# Altium PCB GatewayV1.PcbDoc
Units mil, origin at the board's own origin, x right, y up, seen from the top; angles counter-clockwise.
Board outline 2060 x 2790 mil, 2 copper layers (Top Layer, Bottom Layer); 49 components, 35 nets, 208 pads, 4 vias.
Unrouted connection lines stored in the file: 75.
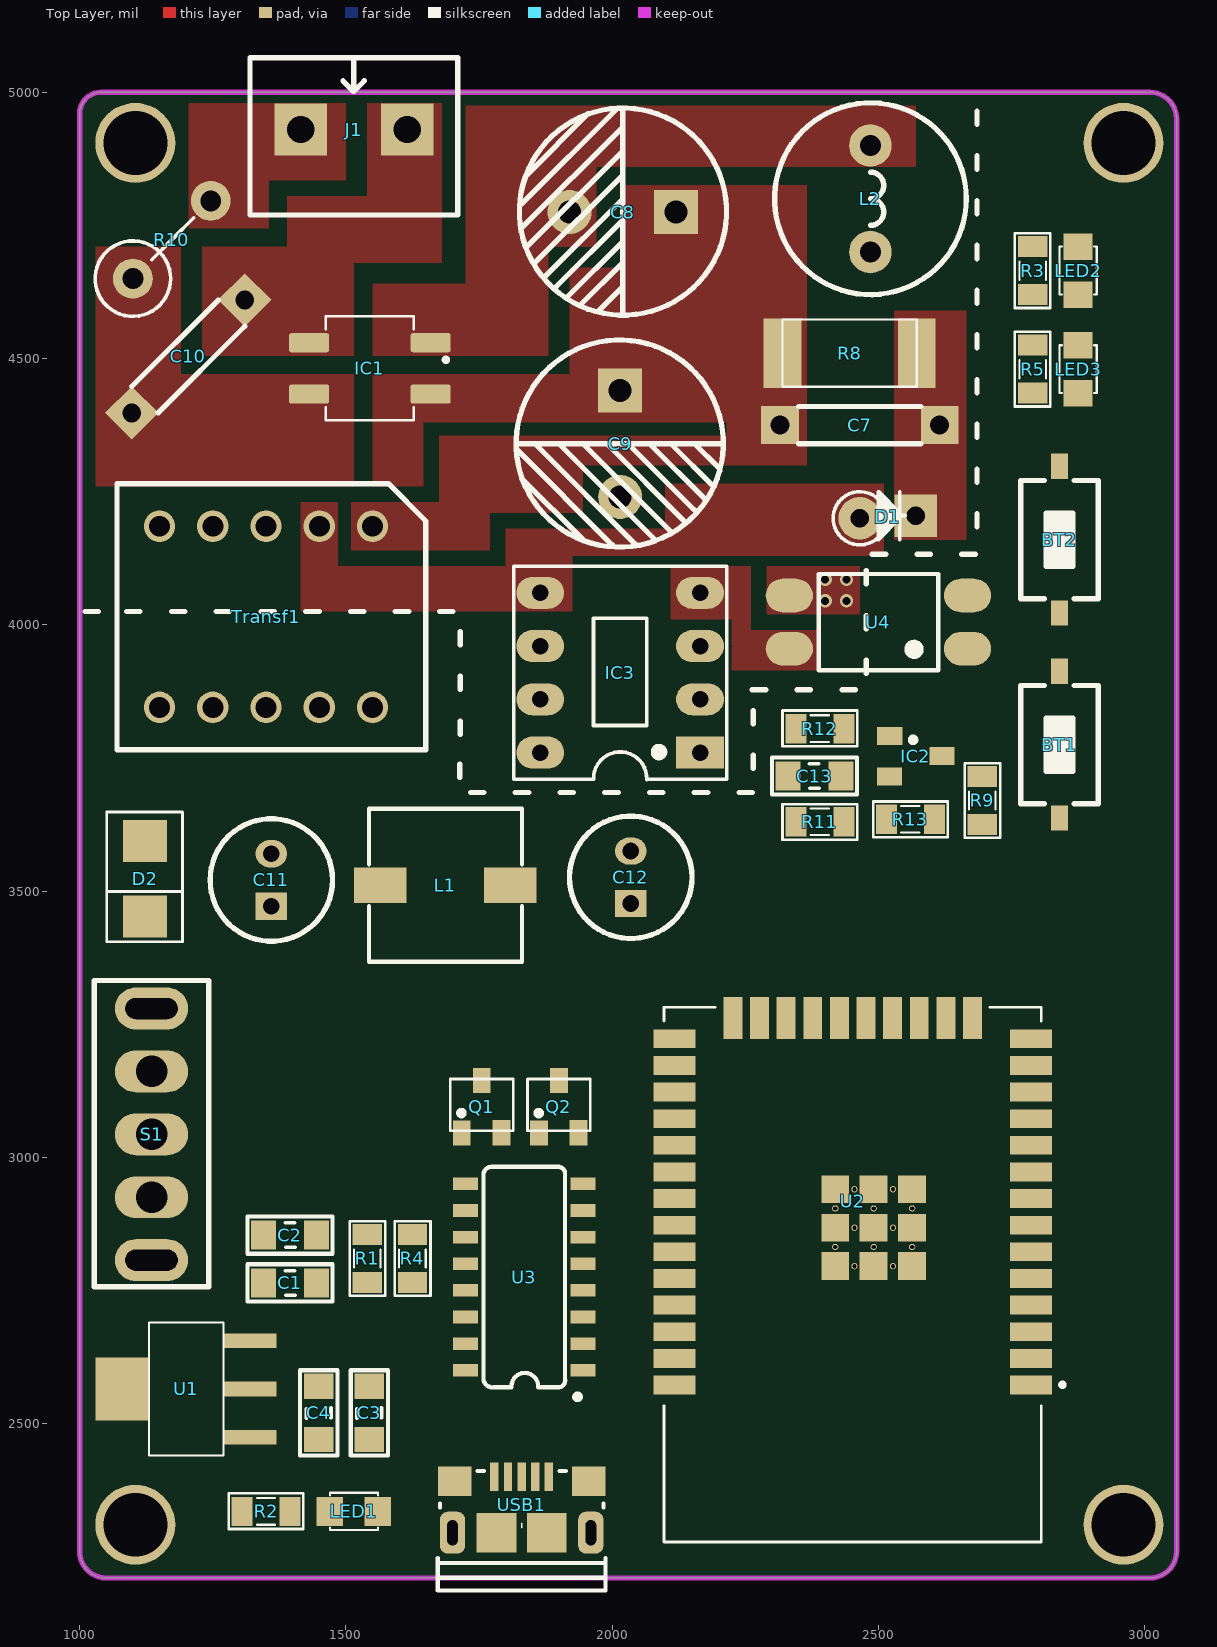
[diagram p0: Top Layer view]
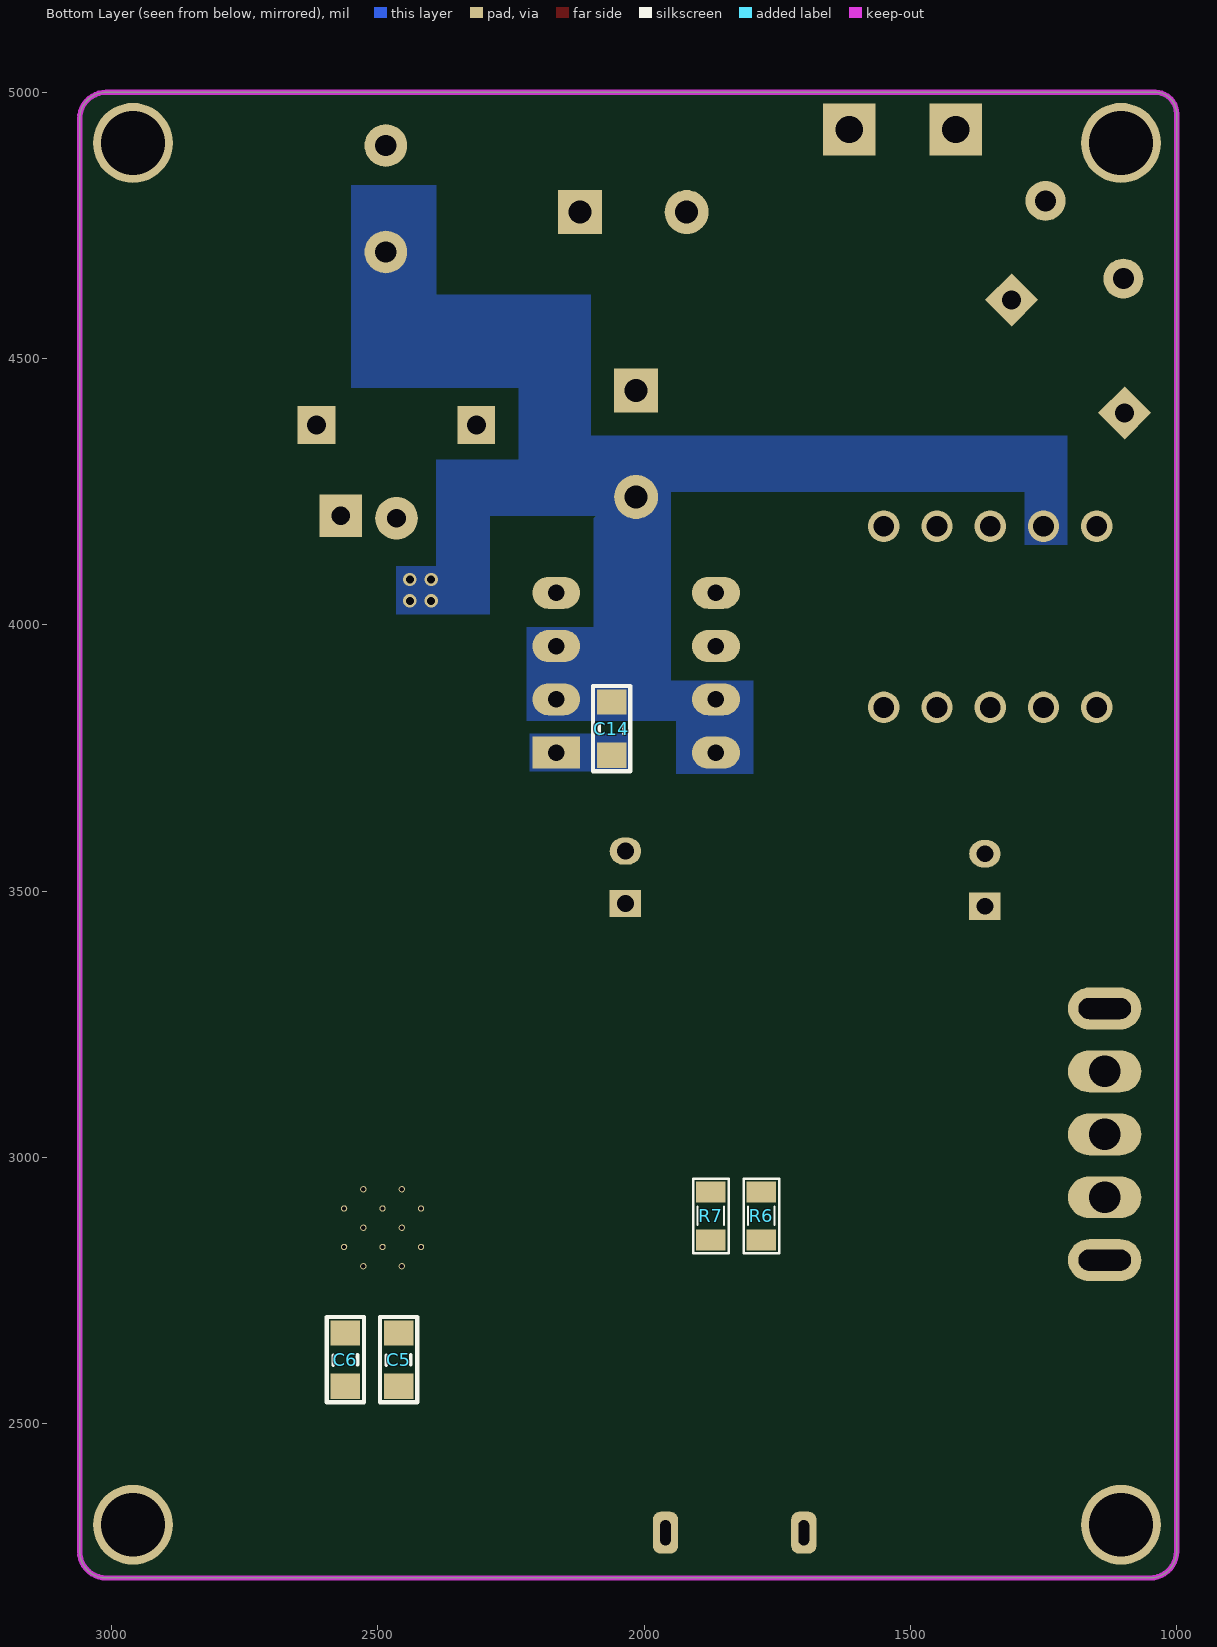
[diagram p1: Bottom Layer view, seen from below]

## Layer stack, top to bottom
Top Solder: solder mask 0.4, Solder Resist, Dk 3.5
Top Layer: signal copper 1.4
Dielectric 1: dielectric 12.6, FR-4, Dk 4.8
Bottom Layer: signal copper 1.4
Bottom Solder: solder mask 0.4, Solder Resist, Dk 3.5

## Board outline
1000,2260 1000,4960 cw(c1040,4960) 1040,5000 3010,5000 cw(c3010,4950) 3060,4950 3060,2260 cw(c3010,2260) 3010,2210 1050,2210 cw(c1050,2260)

## Design rules (kind name [scope] priority, off if disabled: settings)
Clearance [All] p1: gap=15 ignorepadtopadclearanceinfootprint=TRUE
PolygonConnect [All] p1: connectstyle=Direct reliefconductorwidth=10 reliefentries=4 polygonreliefangle="90 Angle" airgapwidth=10
RoutingVias [All] p1: holewidth=28 width=50 viastyle="Through Hole" minholewidth=15 minwidth=25 maxholewidth=90 maxwidth=100
SolderMaskExpansion [All] p1: expansion=4 istentingtop=FALSE
Width [All] p1: maxlimit=100 minlimit=10 preferedwidth=10
30 further rules are at their usual default settings.

## Classes and differential pairs
component class Power: C7 C8 C9 C10 C11 C12 C13 C14 D1 D2 IC1 IC2 IC3 J1 L1 L2 R8 R9 R10 R11 R12 R13 S1 Transf1 U4
component class ESP32: BT1 BT2 C1 C2 C3 C4 C5 C6 LED1 LED2 LED3 Q1 Q2 R1 R2 R3 R4 R5 R6 R7 U1 U2 U3 USB1

## Components (designator, comment, footprint, x,y, rotation, side; value= is the part's Value field where it differs from the comment)
BT1 "Nut Nhan 2 Chan SMD 3x6x2.5" "Nut Nhan 2 Chan SMD 3x6x2.5" 2840,3775 r270 top
BT2 "Nut Nhan 2 Chan SMD 3x6x2.5" "Nut Nhan 2 Chan SMD 3x6x2.5" 2840,4160 r270 top
C1 "10uF" CAP_0805 1395,2765 r0 top value=33p
C2 "100nF" CAP_0805 1395,2855 r0 top value=33p
C3 "10uF" CAP_0805 1545,2520 r270 top value=33p
C4 "100nF" CAP_0805 1450,2520 r270 top value=33p
C5 "100nF" CAP_0805 2460,2620 r270 bottom value=33p
C6 "10uF" CAP_0805 2560,2620 r270 bottom value=33p
C7 "1nF/400V" 103/2KV 2315,4375 r0 top
C8 "10uF/400V" C10mm 2019.65,4772.56 r180 top
C9 "10uF/400V" C10mm 2017.44,4339.65 r270 top
C10 "20D471K" 103/2KV 1310,4610 r225 top
C11 "680uF/16V" C8mm 1360,3520.79 r90 top
C12 "470uF/16V" C8mm 2035,3525.79 r90 top
C13 "100nF" CAP_0805 2380,3715 r180 top value=33p
C14 "100nF" CAP_0805 2060,3805 r270 bottom value=33p
D1 "1N4937" DIO-1AN 2520,4205 r180 top value=1N5007
D2 "SS14" DO-214AC(SMA) 1120,3545 r90 top value=1N5007
IC1 "MB6S" MB6S 1550,4470 r180 top
IC2 "TL431" TL431_SOT 2580,3750 r270 top
IC3 "TNY264" DIP8 2015,3905 r90 top
J1 "AC-IN" KF2-5.08 1515,4930 r0 top
L1 "22uH" L_SMD 1675,3505 r90 top value="150 mH"
L2 "L-DIP-1" Inductor 2485,4800 r270 top value="150 mH"
LED1 "LED" LED-0805-Red 1470,2335 r0 top value="LED 3 ly Single Colour"
LED2 "LED" LED-0805-Red 2875,4620 r90 top value="LED 3 ly Single Colour"
LED3 "LED" LED-0805-Red 2875,4435 r90 top value="LED 3 ly Single Colour"
Q1 "C1815" SOT23D 1755,3095 r0 top
Q2 "C1815" SOT23D 1900,3095 r0 top
R1 "10k" RES-SMD-0805 1540,2810 r90 top
R2 "1k" RES-SMD-0805 1350,2335 r180 top
R3 "1k" RES-SMD-0805 2790,4665 r270 top
R4 "10k" RES-SMD-0805 1625,2810 r90 top
R5 "1k" RES-SMD-0805 2790,4480 r270 top
R6 "10k" RES-SMD-0805 1780,2890 r90 bottom
R7 "10k" RES-SMD-0805 1875,2890 r90 bottom
R8 "82k" RES-SMD-2512 2445.98,4505 r0 top
R9 "200R" RES-SMD-0805 2695,3670 r90 top
R10 "2R/2W" RES-1WW 1145.96,4695.96 r45 top
R11 "10k" RES-SMD-0805 2390,3630 r0 top
R12 "3.3k" RES-SMD-0805 2390,3805 r180 top
R13 "10k" RES-SMD-0805 2560,3635 r0 top
S1 "Switch" Switch 1135,2806.89 r90 top
Transf1 "Transformer EE12.7" "Transformer EE12.7" 1350,4015 r180 top
U1 "LM1117-ADJ" LM1117-SOP 1270,2565 r90 top
U2 "ESP32-WROOM-32" MODULE_ESP32-WROOM-32 2451.75,2779.57 r180 top
U3 "CH340C" SO016 1835,2775 r90 top
U4 "OPTO PC817 SMD" SOP4 2500,4005 r180 top value=PC817
USB1 "USB Micro 5p DIP" "USB Micro 5p DIP" 1830,2295 r0 top

## Footprints (in the part's own frame and the unit in brackets; to place one, negate y for a bottom-side part, rotate by r counter-clockwise, add the part's x,y. Pads: shape width x height; smd on the part's side, far side on the other; paste and mask are expansions set on the pad)
103/2KV [mm]
  rect 1.8x1.8 hole 0.9: 1(0,0) 2(7.62,0)
  silkscreen extent 0.89,-0.89 6.73,0.89, body extent -0.19,-1.2 7.81,1.19, height 9.03
C8mm [mm]
  rect 1.3x1.5 hole 0.8: 1(-1.25,0)
  oval 1.3x1.5 hole 0.8: 2(1.25,0)
  silkscreen extent -2.92,-2.92 2.92,2.92, body extent -3.15,-3.15 3.16,3.15, height 11.51
C10mm [mm]
  rect 2.1x2.1 hole 1.1: 1(-2.549,-0.062)
  round 2.1 hole 1.1: 2(2.531,-0.062)
  silkscreen extent -4.96,-5.02 4.92,4.85, body extent -5.01,-5.06 4.96,4.94, height 20.01
CAP_0805 [mm]
  rect 1.2x1.4 smd: 1(-1.27,-0.025) 2(1.27,-0.025)
  silkscreen extent -2.03,-0.91 2.03,0.86, body extent -1.01,-0.66 1.01,0.61, height 0.61
DIO-1AN [mil] "Diode 1A, W 100mil, L 150mil"
  round 80 hole 35: 1(55,5)
  rect 80x80 hole 35: 2(-50,0)
  silkscreen extent -30,-45 105,55, body extent -64,-50 104,55, height 252
DIP8 [mil] "DIP, 8-Leads, Row Spacing 7.62mm, Pitch 2.54mm, Body 9.91x6.73mm"
  rect 60x90 hole 31: 1(-145,-150)
  oval 60x90 hole 31: 2(-45,-150) 3(55,-150) 4(155,-150) 5(155,150) 6(55,150) 7(-45,150) 8(-145,150)
  silkscreen extent -195,-200 205,200, body extent -213,-153 213,153, height 177
DO-214AC(SMA) [mm] "DO-214AC Diode Smallest Size"
  rect 2x2.1 smd: 1(1.245,-0.076) 2(-2.367,-0.076)
  silkscreen extent -3.56,-1.86 2.62,1.76, body extent -3.13,-1.38 2.07,1.22, height 2.4
Inductor [mil]
  round 80 hole 40: 1(-100,0) 2(100,0)
  silkscreen extent -180,-180 180,180, body extent -171,-171 171,171, height 394
KF2-5.08 [mm]
  rect 2.5x2.5 hole 1.3: 1(-2.54,0) 2(2.54,0)
  silkscreen extent -4.95,-4.08 4.95,3.43, body extent -5,-4.07 5,3.43, height 10
L_SMD [mm]
  rect 1.7x2.5 smd: 1(0.15,2.8) 2(0.15,-3.4)
  silkscreen extent -3.5,-3.95 3.8,3.35, body extent -3.5,-3.95 3.8,3.35, height 4.05
LED-0805-Red [mil]
  rect 50x55 smd: 1(0,0) 2(90,0)
  silkscreen extent 0,-35 90,35, body extent 5,-25 85,25, height 43
LM1117-SOP [mm]
  rect 0.7x2.54 smd: 1(-2.3,-1.27) 2(0,-1.27) 3(2.3,-1.27)
  rect 3x2.54 smd: 2(0,4.826)
  silkscreen extent -3.18,0 3.17,3.56, body extent -3.25,-1.78 3.25,5.18, height 1.68
MB6S [mm]
  rrect23% 1.91x0.91 smd: 1(-2.774,0.935) 2(-2.774,-1.515) 3(3.026,-1.515) 4(3.026,0.935)
  silkscreen extent -3.6,-2.77 2.23,2.19, body extent -3.15,-2.61 3.55,2.11, height 2.7
MODULE_ESP32-WROOM-32 [mm]
  rect 2x0.9 smd: 1(-8.5,5.26) 2(-8.5,3.99) 3(-8.5,2.72) 4(-8.5,1.45) 5(-8.5,0.18) 6(-8.5,-1.09) 7(-8.5,-2.36) 8(-8.5,-3.63) 9(-8.5,-4.9) 10(-8.5,-6.17) 11(-8.5,-7.44) 12(-8.5,-8.71) 13(-8.5,-9.98) 14(-8.5,-11.25) 25(8.5,-11.25) 26(8.5,-9.98) 27(8.5,-8.71) 28(8.5,-7.44) 29(8.5,-6.17) 30(8.5,-4.9) 31(8.5,-3.63) 32(8.5,-2.36) 33(8.5,-1.09) 34(8.5,0.18) 35(8.5,1.45) 36(8.5,2.72) 37(8.5,3.99) 38(8.5,5.26)
  rect 0.9x2 smd: 15(-5.715,-12.25) 16(-4.445,-12.25) 17(-3.175,-12.25) 18(-1.905,-12.25) 19(-0.635,-12.25) 20(0.635,-12.25) 21(1.905,-12.25) 22(3.175,-12.25) 23(4.445,-12.25) 24(5.715,-12.25)
  rect 1.33x1.33 smd: 39_1(-2.835,-0.405) 39_2(-1,-0.405) 39_3(0.835,-0.405) 39_4(-2.835,-2.24) 39_5(-1,-2.24) 39_6(0.835,-2.24) 39_7(-2.835,-4.075) 39_8(-1,-4.075) 39_9(0.835,-4.075)
  round 0.3 hole 0.2: 39_10(-1.917,-0.405) 39_11(-0.082,-0.405) 39_12(-2.835,-1.322) 39_13(-1,-1.322) 39_14(0.835,-1.322) 39_15(-1.917,-2.24) 39_16(-0.082,-2.24) 39_17(-2.835,-3.157) 39_18(-1,-3.157) 39_19(0.835,-3.157) 39_20(-1.917,-4.075) 39_21(-0.082,-4.075)
  silkscreen extent -10.1,-12.75 9,12.75, body extent -9.02,-12.75 8.98,12.75, height 3.2
"Nut Nhan 2 Chan SMD 3x6x2.5" [mm] "Switch SMD type"
  rect 1.2x0.8 smd: 1(-3.5,0) 2(3.5,0)
  silkscreen extent -2.82,-1.85 2.82,1.85, body extent -3.05,-1.85 3.05,1.85, height 2.5
RES-1WW [mm]
  round 1.905 hole 1: 1(-1.651,0) 2(3.6,0)
  silkscreen extent -3.45,-1.8 2.45,1.8
RES-SMD-0805 [mil]
  rect 39.37x55 smd: 1(-45,0) 2(45,0)
  silkscreen extent -70,-34 70,33, body extent -39,-25 39,25, height 31
RES-SMD-2512 [mm] "Chip Capacitor, Body 3.2x2.5mm, IPC Medium Density"
  rect 1.8x3.3 smd: 1(-3.2,0.127) 2(3.2,0.127)
  silkscreen extent -3.2,-1.47 3.2,1.73, body extent -3.2,-1.47 3.2,1.73, height 0.6
SO016 [mm]
  rect 0.6x1.2 smd: 1(-4.445,-2.8) 2(-3.175,-2.8) 3(-1.905,-2.8) 4(-0.635,-2.8) 5(0.635,-2.8) 6(1.905,-2.8) 7(3.175,-2.8) 8(4.445,-2.8) 9(4.445,2.8) 10(3.175,2.8) 11(1.905,2.8) 12(0.635,2.8) 13(-0.635,2.8) 14(-1.905,2.8) 15(-3.175,2.8) 16(-4.445,2.8)
  silkscreen extent -5.84,-2.67 5.26,1.95, body extent -4.99,-3.13 4.99,3.1, height 1.58
SOP4 [mm]
  oval 2.25x1.6 smd: 1(-4.25,1.27) 2(-4.25,-1.27) 3(4.25,-1.27) 4(4.25,1.27)
  silkscreen extent -2.85,-2.3 2.85,2.3, body extent -4.67,-2.29 4.93,2.31, height 3.6
SOT23D [mm] "SOT 23C - 1-3-2 - BCE"
  rect 0.85x1.2 smd: 1(-0.95,-1.25) 2(0.94,-1.245) 3(0,1.25)
  silkscreen extent -1.5,-1.14 1.5,1.32, body extent -1.5,-1.17 1.5,1.33, height 1.06
Switch [mm]
  oval 2x3.5 hole 1.5: 1(3,0) 2(6,0) 3(9,0)
  oval 2x3.5 hole 1 slot 2.5 at 90 deg: 4(0,0) 5(12,0)
  silkscreen extent -1.27,-2.73 13.34,2.73, body extent -0.5,-2.85 12.5,9.35, height 2.6
TL431_SOT [mm]
  rect 0.85x1.2 smd: 1(0.885,-1.5) 2(-0.095,1) 3(-1.04,-1.495)
  silkscreen extent -0.98,-0.5 -0.74,-0.25, body extent -1.57,-1.58 1.43,0.92, height 1.06
"Transformer EE12.7" [mm]
  round 1.5 hole 1: 1(-5.08,-4.318) 2(-2.54,-4.318) 3(0,-4.318) 4(2.54,-4.318) 5(5.08,-4.318) 6(5.08,4.318) 7(2.54,4.318) 8(0,4.318) 9(-2.54,4.318) 10(-5.08,4.318)
  silkscreen extent -7.62,-6.35 7.11,6.35
"USB Micro 5p DIP" [mm]
  rect 0.4x1.35 smd mask+0.05: 1(-1.3,2.675) 2(-0.65,2.675) 3(0,2.675) 4(0.65,2.675) 5(1.3,2.675)
  rrect60% 1.2x2 hole 0.5 slot 1.2 at 90 deg: 5(-3.3,0) 5(3.3,0)
  rect 1.6x1.4 smd: 5(-3.2,2.45) 5(3.2,2.45)
  rect 1.9x1.9 smd paste-10: 5(-1.2,0) 5(1.2,0)
  silkscreen extent -4,-2.75 4,2.95, body extent -3.93,-2.76 3.93,2.9, height 2.85

## Part data
C1 C2 C3 C4 C5 C6 C13 C14: library part CapSMD, "Capacitor", LatestRevisionDate=17-Jul-2002, LatestRevisionNote="Re-released for DXP Platform.", PackageReference=RAD-0.3, Published=8-Jun-2000, Publisher="Altium Limited"
C7: library part Cap2KV, "CAP CERAMIC", LatestRevisionDate=17-Jul-2002, LatestRevisionNote="Re-released for DXP Platform.", PackageReference=RAD-0.3, Published=8-Jun-2000, Publisher="Altium Limited"
C8 C9 C11 C12: library part "Cap Pol", "Polarized Capacitor (Axial)", LatestRevisionDate=17-Jul-2002, LatestRevisionNote="Re-released for DXP Platform.", PackageReference=POLAR0.8, Published=8-Jun-2000, Publisher="Altium Limited"
C10: library part Cap2KV, "Varistor", LatestRevisionDate=17-Jul-2002, LatestRevisionNote="Re-released for DXP Platform.", PackageReference=RAD-0.3, Published=8-Jun-2000, Publisher="Altium Limited"
D1: library part "Diode SMD", "Diode Schottky / 1N4937", Code - JEDEC=DO-214-AB, Published=8-Jun-2000, Publisher="Altium Limited", Revision="July-2002: Re-released for DXP Platform."
D2: library part "Diode SMD", "Diode Schottky / 1N5819", Code - JEDEC=DO-214-AB, Published=8-Jun-2000, Publisher="Altium Limited", Revision="July-2002: Re-released for DXP Platform."
IC2: "Programmable Shunt Regulator"
IC3: "Enhanced, Energy Efficient, Low Power Off-line Switcher"
J1: library part KF2, Manufacturer="Würth Elektronik eiSos GmbH", partNo=691103110002, ComponentLink1 Description=Manufacturer, ComponentLink1URL=http://www.we-online.com, ComponentLink2 Description=Datasheet, ComponentLink2URL=http://katalog.we-online.de/em/datasheet/6911031100xx.pdf, Created by="Karrer Zheng", Created Date="29 October 2013", NoPins=2
L1: library part Inductor, "CD73R 22uH 1.23A 7345"
L2: "Inductor"
LED1 LED2 LED3: "LED Single colour Green and Red"
Q1 Q2: library part 2SC1815, "NPN 600mW, ECB"
R1 R2 R3 R4 R5 R6 R7 R8 R9 R10 R11 R12 R13: library part "Resistor - SMD", "Resistor", Manufacturer="Generic Components", Class=Passive, Published=08/06/2000, Publisher="Altium Hobart Technology Centre"
Transf1: library part "Tranformer EE16"
U1: "800mA Low-Dropout Linear Regulator", Creator="Nguyen Ba Bien", Website=http://group3i.net
U2: "Bluetooth, WiFi Transceiver Module 2.4GHz ~ 2.5GHz Surface Mount", Package="Module Espressif Systems", Digi-Key_Part_Number=1904-1010-1-ND, Digi-Key_Purchase_URL=https://www.digikey.com/product-detail/en/espressif-systems/ESP32-WROOM-32/1904-1010-1-ND/8544305?utm_source=snapeda&utm_medium=aggregator&utm_campaign=symbol, MF="Espressif Systems", MP=ESP32-WROOM-32, SnapEDA_Link=https://www.snapeda.com/parts/ESP32-WROOM-32/Espressif%20Systems/view-part/2753322/?ref=snap
U3: "USB to serial chip CH340", Package=Package, Availability=Unavailable, Check_prices=https://www.snapeda.com/parts/CH340C/WCH/view-part/5428851/?ref=eda, MF=WCH, MP=CH340C, Price=None, SnapEDA_Link=https://www.snapeda.com/parts/CH340C/WCH/view-part/5428851/?ref=snap
U4: "Single Opto"
USB1: "USB Type B", Ma_Hang=MH005145, Ten="MicroUSB MK5P DIP"
BT1 BT2: Ma_Hang=MH001036, Ten="Nút Nhấn 2 Chân 3x6x2.5MM SMD"

## Free pads (board coordinates)
  round 150 hole 120: 0(1104.55,2310) 0(1104.55,4905) 0(2960,2310) 0(2960,4905)

## Via types
v1: diameter 25, hole 15, Top Layer to Bottom Layer, 4 vias

## Nets (pads, with @x,y where several pads share a name; then routed paths per layer and width w, separated by ;. In a path a pad name is that pad's centre, name@x,y a point inside that pad or via, vN(x,y) a via of type N, cw(c..) or ccw(c..) an arc to the next point about the centre after c; other vN are vias at no path point)
+3.3V: C3.1 C4.1 C5.1 C6.1 R1.1 R2.2 R4.1 U1.2 U2.2 U3.4 U3.16
+5: C1.1 C2.1 S1.1 U1.3 USB1.1
CH340_RXD: U2.35 U3.3
CH340_TXD: U2.34 U3.2
D_N: U3.6 USB1.3
D_P: U3.5 USB1.4
DTR: Q2.2 R6.1 U3.13
EN: BT1.2 Q1.3 R1.2 U2.3
GND: BT1.1 BT2.1 C1.2 C2.2 C3.2 C4.2 C5.2 C6.2 C11.2 C12.2 IC2.2 LED1.2 R3.2 R5.2 R13.2 Transf1.10 U1.1 U2.1 U3.1 USB1.5
GND_IN: C9.2 C14.1 IC3.2 IC3.3 IC3.7 IC3.8 L2.2 Transf1.4 U4.3
  other v1: 2400,4045 2440,4045 2400,4085 2440,4085
IO0: BT2.2 Q2.3 R4.2 U2.25
IO32: LED2.1 U2.8
IO33: LED3.1 U2.9
NetC7_1: C7.1 C8.1 C9.1 IC1.1 R8.1 Transf1.1
NetC7_2: C7.2 D1.2 R8.2
NetC8_2: C8.2 IC1.2 L2.1
NetC10_1: C10.1 IC1.3 J1.2
NetC10_2: C10.2 IC1.4 R10.1
NetC11_1: C11.1 D2.2 L1.1
NetC12_1: C12.1 L1.2 R9.1 R11.1 S1.2
NetC13_1: C13.1 IC2.1 R11.2 R13.1
NetC13_2: C13.2 R12.2
NetC14_2: C14.2 IC3.1
NetD1_1: D1.1 IC3.5 Transf1.2
NetD2_1: D2.1 Transf1.6
NetIC2_3: IC2.3 R12.1 U4.2
NetIC3_4: IC3.4 U4.4
NetJ1_1: J1.1 R10.2
NetLED1_1: LED1.1 R2.1
NetLED2_2: LED2.2 R3.1
NetLED3_2: LED3.2 R5.1
NetQ1_1: Q1.1 R6.2
NetQ2_1: Q2.1 R7.2
NetR9_2: R9.2 U4.1
RST: Q1.2 R7.1 U3.14
pads on no net: IC3.6 S1.3 S1.4 S1.5 Transf1.3 Transf1.5 Transf1.7 Transf1.8 Transf1.9 U2.4 U2.5 U2.6 U2.7 U2.10 U2.11 U2.12 U2.13 U2.14 U2.15 U2.16 U2.17 U2.18 U2.19 U2.20 U2.21 U2.22 U2.23 U2.24 U2.26 U2.27 U2.28 U2.29 U2.30 U2.31 U2.32 U2.33 U2.36 U2.37 U2.38 U2.39_1 U2.39_2 U2.39_3 U2.39_4 U2.39_5 U2.39_6 U2.39_7 U2.39_8 U2.39_9 U2.39_10 U2.39_11 U2.39_12 U2.39_13 U2.39_14 U2.39_15 U2.39_16 U2.39_17 U2.39_18 U2.39_19 U2.39_20 U2.39_21 U3.7 U3.8 U3.9 U3.10 U3.11 U3.12 U3.15 USB1.2

## Polygon pours and split planes (outlines as drawn)
NetC7_1 on Top Layer "100" (solid, pour order 25): 2365,4355 2365,4300 1770,4300 1770,4140 1510,4140 1510,4230 1675,4230 1675,4355
NetC7_1 on Top Layer "100" (solid, pour order 29): 1770,4300 1945,4300 1945,4210 1770,4210
NetC7_1 on Top Layer "100" (solid, pour order 26): 1550,4380 1550,4260 1645,4260 1645,4380
NetC7_1 on Top Layer "100" (solid, pour order 6): 1550,4470 1550,4380 2080,4380 2080,4550 1920,4550 1920,4470
NetC10_2 on Top Layer "100" (solid, pour order 3): 1515,4470 1515,4260 1030,4260 1030,4470
NetD1_1 on Top Layer "100" (solid, pour order 24): 1800,4025 1415,4025 1415,4230 1485,4230 1485,4110 1800,4110
NetIC3_4 on Top Layer "100" (solid, pour order 22): 2110,4110 2260,4110 2260,3990 2390,3990 2390,3910 2385,3915 2225,3915 2225,4010 2110,4010
GND_IN on Top Layer "100" (solid, pour order 19): 2290,4110 2290,4020 2465,4020 2465,4110
NetD1_1 on Top Layer "100" (solid, pour order 17): 2510,4265 2510,4130 1925,4130 1925,4025 1800,4025 1800,4180 2100,4180 2100,4265
NetC7_2 on Top Layer "100" (solid, pour order 12): 2530,4590 2530,4160 2665,4160 2665,4590
NetC7_1 on Top Layer "100" (solid, pour order 10): 2215,4335 2365,4335 2365,4825 2210,4825
NetC8_2 on Top Layer "100" (solid, pour order 9): 1970,4975 2570,4975 2570,4860 1970,4860
NetC7_1 on Top Layer "100" (solid, pour order 8): 2020,4825 2210,4825 2215,4820 2215,4380 1920,4380 1920,4670 2020,4670
NetJ1_1 on Top Layer "100" (solid, pour order 7): 1500,4980 1500,4835 1355,4835 1355,4745 1205,4745 1205,4980
NetC10_2 on Top Layer "100" (solid, pour order 1): 1030,4710 1030,4335 1190,4335 1190,4710
NetC8_2 on Top Layer "100" (solid, pour order 5): 1550,4505 1880,4505 1880,4710 1970,4710 1970,4975 1725,4975 1725,4640 1550,4640
NetC10_1 on Top Layer "100" (solid, pour order 4): 1540,4980 1680,4980 1680,4680 1390,4680 1390,4805 1540,4805
NetC10_1 on Top Layer "100" (solid, pour order 2): 1230,4710 1230,4505 1515,4505 1515,4710
NetC14_2 on Bottom Layer "100" (solid, pour order 30): 2030,3795 2030,3725 2215,3725 2215,3795
GND_IN on Bottom Layer "100" (solid, pour order 27): 1950,4355 1205,4355 1205,4150 1285,4150 1285,4250 1950,4250
GND_IN on Bottom Layer "100" (solid, pour order 21): 2235,4310 2290,4310 2290,4205 2235,4205
GND_IN on Bottom Layer "100" (solid, pour order 20): 2390,4110 2465,4110 2465,4020 2390,4020
GND_IN on Bottom Layer "100" (solid, pour order 18): 2290,4310 2390,4310 2390,4020 2290,4020
GND_IN on Bottom Layer "100" (solid, pour order 16): 1950,3995 1950,4205 2090,4205 2095,4200 2095,3995
GND_IN on Bottom Layer "100" (solid, pour order 15): 1795,3895 1795,3720 1940,3720 1940,3820 2220,3820 2220,3995 1950,3995 1950,3895
GND_IN on Bottom Layer "100" (solid, pour order 14): 2390,4445 2235,4445 2235,4205 1950,4205 1950,4355 2100,4355 2100,4620 2390,4620
GND_IN on Bottom Layer "100" (solid, pour order 13): 2390,4825 2390,4445 2550,4445 2550,4825

## Keep-outs
Keep-Out Layer:
  the board outline again, w10

## Silkscreen, mask and mechanical layers (free items; w line width, h text height)
Top Overlay:
  lines w10: 1010,4025 1035,4025 ; 1088.44,4025 1113.44,4025 ; 1172.5,4025 1197.5,4025 ; 1256.56,4025 1281.56,4025 ; 1340.62,4025 1365.62,4025 ; 1424.69,4025 1449.69,4025 ; 1508.75,4025 1533.75,4025 ; 1592.81,4025 1617.81,4025 ; 1675.94,4025 1700.94,4025 ; 1713.77,3713.4 1713.77,3738.4 ; 1715,3794.38 1715,3819.38 ; 1715,3878.44 1715,3903.44 ; 1715,3962.5 1715,3987.5 ; 1734.06,3685 1759.06,3685 ; 1818.12,3685 1843.12,3685 ; 1902.19,3685 1927.19,3685 ; 1986.25,3685 2011.25,3685 ; 2070.31,3685 2095.31,3685 ; 2154.38,3685 2179.38,3685 ; 2238.44,3685 2263.44,3685 ; 2263.38,3877.81 2288.38,3877.81 ; 2265,3730 2265,3755 ; 2265,3814.06 2265,3839.06 ; 2347.44,3877.81 2372.44,3877.81 ; 2431.51,3877.81 2456.51,3877.81 ; 2477.19,3908.38 2477.19,3933.38 ; 2477.19,3992.44 2477.19,4017.44 ; 2477.19,4076.51 2477.19,4101.51 ; 2488.49,4132.19 2513.49,4132.19 ; 2572.56,4132.19 2597.56,4132.19 ; 2656.62,4132.19 2681.62,4132.19 ; 2685,4183.44 2685,4208.44 ; 2685,4267.5 2685,4292.5 ; 2685,4351.56 2685,4376.56 ; 2685,4435.62 2685,4460.62 ; 2685,4519.69 2685,4544.69 ; 2685,4603.44 2685,4628.44 ; 2685,4687.5 2685,4712.5 ; 2685,4771.56 2685,4796.56 ; 2685,4855.62 2685,4880.62 ; 2685,4939.69 2685,4964.69